# Altium PCB STM32_PCB.PcbDoc (part 2 of 2)
Units mil, origin at the board's own origin, x right, y up, seen from the top; angles counter-clockwise.
Board outline 3550 x 2490 mil, 4 copper layers (Top Layer, Power, Ground, Bottom Layer); 106 components, 122 nets, 470 pads, 207 vias.
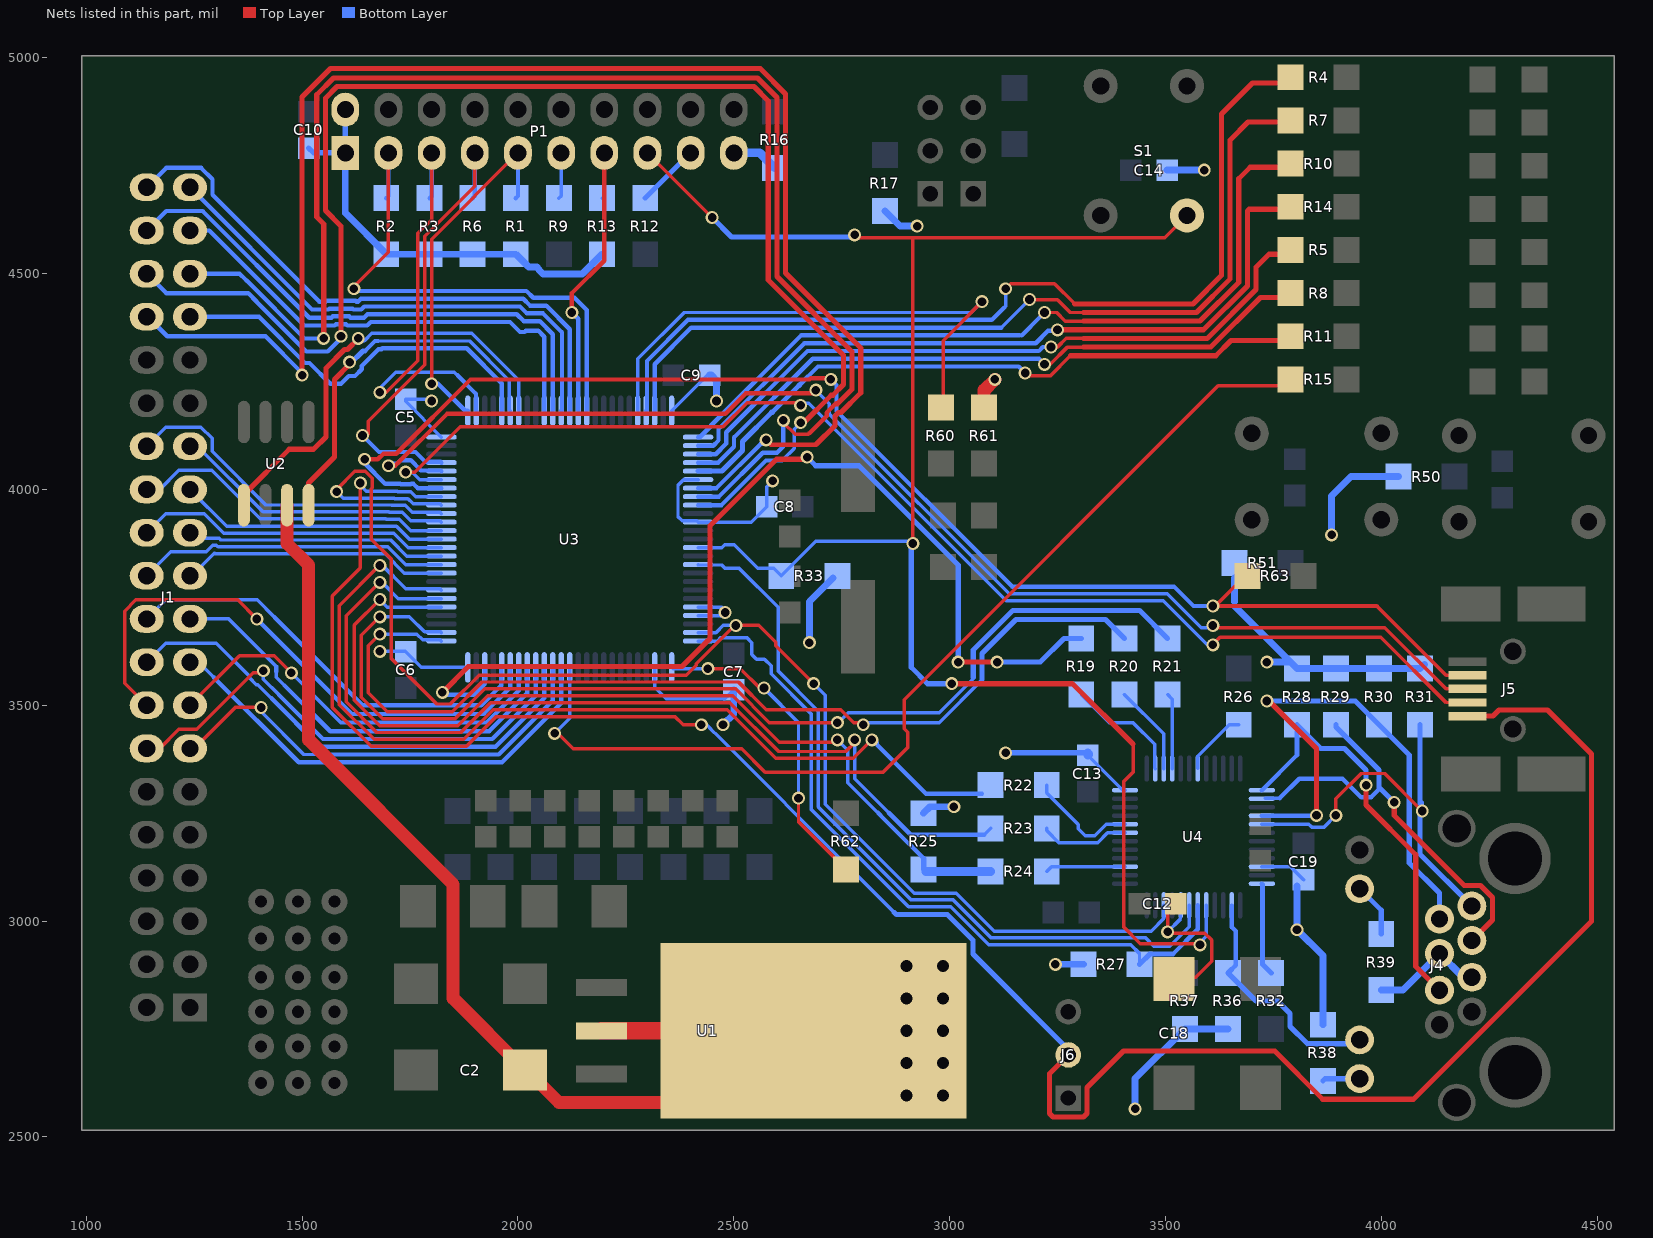
[diagram p4: the nets of this part, all layers, seen from the top]

## Via types
v1: diameter 30, hole 20, Top Layer to Bottom Layer, 162 vias
v2: diameter 50, hole 28, Top Layer to Bottom Layer, 45 vias

## Nets (pads, with @x,y where several pads share a name; then routed paths per layer and width w, separated by ;. In a path a pad name is that pad's centre, name@x,y a point inside that pad or via, vN(x,y) a via of type N, cw(c..) or ccw(c..) an arc to the next point about the centre after c; other vN are vias at no path point) (continued)
NetJ4_10: J4.10 R39.2 | length 125.7
  Bottom Layer w12: J4.10@3950,3075 4000,3025 R39.2@4000,2970
NetJ4_11: J4.11 R36.2 U4.26 | length 561.3
  Bottom Layer w10: R36.2@3654,2889 3663,2898 3663,2977 3654,2986 U4.26@3654,3036.12
  Bottom Layer w12: R36.2@3654,2889 R36.2@3645,2880 3710,2815 3759.8,2815 3789,2785.8 3789,2756.2 3829.2,2716 3941,2716 J4.11@3950,2725
NetJ4_12: J4.12 R38.1 | length 87.1
  Bottom Layer w12: R38.1@3865,2630 3870,2635 J4.12@3950,2635
NetJ5_1: J5.1 J6.2 U3.68 | length 5322.5
  Top Layer w8: v1(1635,4015) 1635,3818.18 1570,3753.18 1570,3495 1660,3405 1880.76,3405 1949.76,3474 2363.49,3474 2382.49,3455 v1(2425,3455)
  Top Layer w12: J6.2@3275,2690 3231.47,2646.47 3231.47,2554.67 3239.67,2546.47 3310.33,2546.47 3318.53,2554.67 3318.53,2614.54 3402.99,2699 3753.24,2699 3864.7,2587.54 4074.66,2587.54 4487.03,2999.91 4487.03,3387.3 4385.33,3489 4272.77,3489 4258.77,3475 J5.1@4200,3475
  Bottom Layer w8: v1(1635,4015) 1635,4010 1649,3996 1720.36,3996 1721.36,3995 1751.83,3995 1763.4,3983.43 U3.68@1822.76,3983.43 ; v1(2425,3455) 2436.97,3455 2448,3443.97 2448,3443.82 2463.82,3428 2463.97,3428 2775.99,3115.99 ; 2778.49,3113.49 2871.97,3020
  Bottom Layer w12: 2775.99,3115.99 2778.49,3113.49 ; 2871.97,3020 2876.97,3015 2994.8,3015 3054,2955.8 3054,2923.94 3275,2702.94 J6.2@3275,2690
NetJ5_2: J5.2 U3.70 | length 2928.1
  Top Layer w8: v1(1740,4040) 1761,4040 1866,4145 2475,4145 2531,4201 2654,4201 2655,4200 v1(2655,4195) ; v1(3610,3640) 3610,3641.48 3626.52,3658 3998.5,3658 4150,3506.5 J5.2@4200,3506.5
  Bottom Layer w8: v1@1739.04,4040 v1(1740,4040) 1754.91,4040 1772.12,4022.8 U3.70@1822.76,4022.8 ; v1(2655,4195) 2660,4200 2673.33,4200 3131.33,3742 3494.97,3742 3596.97,3640 v1(3610,3640)
NetJ5_3: J5.3 U3.71 | length 3029
  Top Layer w8: v1@3601.82,3680 4007.99,3680 4150,3537.99 J5.3@4200,3537.99
  Top Layer w10: v1(1700,4055) 1715.4,4055 1835.6,4175.2 2480.2,4175.2 2528,4223 2683,4223 v1(2690,4230)
  Bottom Layer w8: v1(2690,4230) 2721,4199 2721,4174.96 3137.96,3758 3504.63,3758 3582.63,3680 3605,3680 v1(3610,3685)
  Bottom Layer w10: v1@1694,4061 v1(1700,4055) ; v1@1700,4060 1720.4,4060 1728.4,4068 1751.6,4068 1773,4046.6 1773,4045.96 1774.79,4044.17 1821.07,4044.17 U3.71@1822.76,4042.48
NetJ5_4: J5.4 R63.2 U3.69 | length 3268.9
  Top Layer w8: v1@3615,3730 3685,3800 R63.2@3690,3800 ; 3989.49,3730 4150,3569.49 J5.4@4200,3569.49
  Top Layer w10: v1(1645,4070) 1675.4,4070 1688.4,4083 1717.95,4083 1889.95,4255 2675.4,4255 2678.4,4258 2722,4258 v1(2725,4255) ; v1(3610,3730) 3615,3730 3989.49,3730
  Bottom Layer w10: v1(1645,4070) 1645,4060.8 1692.8,4013 1727.4,4013 1728.4,4012 1751.6,4012 1752.6,4013 1757.87,4013 1767.76,4003.11 U3.69@1822.76,4003.11 ; v1(2725,4255) 2738,4242 2738,4182 3145,3775 3520,3775 3565,3730 v1(3610,3730)
NetP1_3: P1.3 R2.1 U3.90 | length 1248.4
  Top Layer w8: v1(1620,4465) 1620,4470 1700,4550 P1.3@1700,4780
  Bottom Layer w8: v1(1620,4465) v1@1625,4460
  Bottom Layer w10: v1@1625,4460 1645,4460 2019.59,4460 2035.59,4444 2131,4444 2159.37,4415.63 U3.90@2159.37,4182.24 ; R2.1@1695,4675 1700,4680 P1.3@1700,4780
NetP1_5: P1.5 R3.1 U3.77 | length 1029.7
  Top Layer w8: v1(1680,4225) 1695,4225 1768,4298 1768,4593.25 1800,4625.25 P1.5@1800,4780
  Bottom Layer w8: v1(1680,4225) 1680,4235 1717,4272 1852.54,4272 1860,4264.54
  Bottom Layer w10: R3.1@1795,4675 1800,4680 P1.5@1800,4780 ; 1860,4265 1860,4264.54 1903,4221.54 1903,4182.71 U3.77@1903.46,4182.24
NetP1_7: P1.7 R6.1 U3.72 | length 1084.4
  Top Layer w8: v1(1640,4125) 1650,4125 1653,4128 1653,4158 1784,4289 1784,4586.63 1900,4702.63 P1.7@1900,4780
  Bottom Layer w10: v1(1640,4125) 1678,4087 1762.76,4087 1785.81,4063.94 1820.98,4063.94 U3.72@1822.76,4062.17 ; R6.1@1895,4675 1900,4680 P1.7@1900,4780
NetP1_9: P1.9 R1.1 U3.76 | length 834.7
  Top Layer w8: v1(1800,4245) 1800,4580 P1.9@2000,4780
  Bottom Layer w10: v1(1800,4245) 1815,4245 1877.76,4182.24 U3.76@1883.78,4182.24 ; R1.1@1995,4675 2000,4680 P1.9@2000,4780
NetP1_11: P1.11 R9.1 | length 107.1
  Bottom Layer w8: R9.1@2095,4675 2100,4680 P1.11@2100,4780
NetP1_13: P1.13 R13.2 U3.89 | length 742
  Top Layer w10: v1(2125,4410) 2125,4455 2200,4530 P1.13@2200,4780
  Bottom Layer w8: R13.2@2195,4675 2200,4680 P1.13@2200,4780
  Bottom Layer w10: v1(2125,4410) 2139.69,4395.31 U3.89@2139.69,4182.24
NetP1_17: P1.17 R12.2 | length 148.5
  Bottom Layer w12: R12.2@2295,4675 P1.17@2400,4780
NetP1_19: P1.19 R16.2 | length 109.5
  Bottom Layer w20: P1.19@2500,4780 2560,4780 R16.2@2595,4745
NetR4_2: R4.2 U3.97 | length 2160.8
  Top Layer w8: v1(3130,4465) 3142,4477 3243,4477 3290,4430
  Top Layer w12: 3290,4430 3563.58,4430 3630,4496.42 3630,4870 3701.6,4941.6 3776.6,4941.6 R4.2@3790,4955
  Bottom Layer w8: 3126.63,4421.63 3130,4425 v1(3130,4465)
  Bottom Layer w10: U3.97@2297.17,4182.24 2298.85,4183.93 2298.85,4297.69 2394.16,4393 3098,4393 3126.63,4421.63
NetR5_2: R5.2 U3.3 | length 1612.4
  Top Layer w8: v1(3235,4330) 3250,4330 3270,4350 3310,4350
  Top Layer w12: 3310,4350 3596.72,4350 3710,4463.28 3710,4515 3740,4545 R5.2@3790,4545
  Bottom Layer w10: U3.3@2417.24,4081.85 2458.18,4081.85 2482.68,4106.35 2482.68,4132.68 2671,4321 3206.91,4321 3215.91,4330 3230,4330 v1@3235,4325
NetR7_2: R7.2 U3.98 | length 2028.5
  Top Layer w8: v1(3185,4440) 3250,4440 3280,4410 3310,4410
  Top Layer w12: 3310,4410 3571.86,4410 3650,4488.14 3650,4810 3691.6,4851.6 3786.6,4851.6 R7.2@3790,4855
  Bottom Layer w8: 3120,4375 v1(3185,4440)
  Bottom Layer w10: U3.98@2316.85,4182.24 2316.85,4290.23 2401.62,4375 3120,4375
NetR8_2: R8.2 U3.4 | length 1569
  Top Layer w8: v1(3220,4290) 3233.18,4290 3273.18,4330 3310,4330
  Top Layer w12: 3310,4330 3605,4330 3720,4445 3780,4445 R8.2@3790,4455
  Bottom Layer w8: v1@3215,4285 v1(3220,4290)
  Bottom Layer w10: U3.4@2417.24,4062.17 2463.95,4062.17 2500.68,4098.89 2500.68,4120.68 2683,4303 3207,4303 3215,4295 v1@3215,4285
NetR10_2: R10.2 U3.1 | length 1793.1
  Top Layer w8: v1(3220,4410) 3248.18,4410 3268.18,4390 3310,4390
  Top Layer w12: 3310,4390 3580.15,4390 3670,4479.85 3670,4720 3696.6,4746.6 3781.6,4746.6 R10.2@3790,4755
  Bottom Layer w8: 3162,4357 3167,4357 ; v1@3210.63,4400.63 v1(3220,4410)
  Bottom Layer w10: U3.1@2417.24,4121.22 2421.22,4121.22 2446.68,4146.68 2446.68,4147.59 2656.09,4357 3162,4357 ; 3167,4357 v1@3210.63,4400.63
NetR11_2: R11.2 U3.5 | length 1528.6
  Top Layer w8: v1(3175,4270) 3182,4263 3233,4263 3280,4310
  Top Layer w12: 3280,4310 3616.72,4310 3651.72,4345 R11.2@3790,4345
  Bottom Layer w10: 2651.6,4241.6 2695,4285 3160,4285 v1(3175,4270)
  Bottom Layer w12: U3.5@2417.24,4042.48 2472.47,4042.48 2520,4090.01 2520,4111.01 2587.99,4179 2589,4179 2651.6,4241.6
NetR14_2: R14.2 U3.2 | length 1719
  Top Layer w12: v1(3250,4370) 3588.43,4370 3690,4471.57 3690,4645 3694.1,4649.1 3784.1,4649.1 R14.2@3790,4655
  Bottom Layer w8: v1@3247.63,4367.63 v1(3250,4370)
  Bottom Layer w10: U3.2@2417.24,4101.54 2452.41,4101.54 2464.68,4113.8 2464.68,4140.13 2663.54,4339 3199.46,4339 3228.09,4367.63 v1@3247.63,4367.63
NetR15_2: R15.2 U3.38 | length 2358.7
  Top Layer w8: v1(2085,3435) 2091.82,3435 2127.82,3399 2518.37,3399 2572.37,3345 2845.81,3345 2903,3402.19 2903,3437.81 2895,3445.81 2895,3513.18 3621.82,4240 3785,4240 R15.2@3790,4245
  Bottom Layer w8: v1(2085,3435) 2120,3470 U3.38@2120,3587.76
NetR19_1: R19.1 U3.48 | length 2366.1
  Top Layer w12: v1(1825,3530) 1885,3590 2380,3590 2445,3655 2445,3916.01 2598.99,4070 2665,4070 v1(2670,4075) ; v1@3015,3605 v1(3020,3600) v1(3110,3600)
  Bottom Layer w10: v1(1825,3530) 1830.68,3524.32 1897.82,3524.32 1923.15,3549.65 U3.48@1923.15,3587.76
  Bottom Layer w12: v1(2670,4075) 2690,4055 2790,4055 3020,3825 v1(3020,3600) ; v1(3110,3600) 3210,3600 3265,3655 R19.1@3305,3655
NetR19_2: R19.2 U4.2 | length 274.8
  Bottom Layer w8: R19.2@3305,3525 3370,3460 3425,3460 3475,3410 3475,3354.88 U4.2@3476.42,3353.46
NetR20_1: R20.1 U3.51 | length 2291.5
  Top Layer w8: v1(1680,3665) 1653,3638 1653,3528.82 1696.82,3485 1847.63,3485 1916.63,3554 2511,3554 2575,3490 2748.18,3490 2778.18,3460 2795,3460 v1(2800,3455)
  Bottom Layer w8: v1(1680,3665) 1765.97,3665 1779.41,3651.56 1819.98,3651.56 U3.51@1822.76,3648.78 ; v1(2800,3455) 2805,3460 2975.81,3460 3075,3559.19 3075,3560
  Bottom Layer w12: 3075,3560 3075,3620 3154,3699 3361,3699 R20.1@3405,3655
NetR20_2: R20.2 U4.3 | length 209.3
  Bottom Layer w8: R20.2@3405,3525 3496.1,3433.9 U4.3@3496.1,3353.46
NetR21_1: R21.1 U3.52 | length 2485.1
  Top Layer w8: v1(1680,3705) 1637,3662 1637,3518.51 1686.51,3469 1854.25,3469 1923.25,3538 2504.37,3538 2582.37,3460 v1(2740,3460)
  Bottom Layer w8: v1(1680,3705) 1748.6,3705 1783.6,3670 1821.22,3670 U3.52@1822.76,3668.46 ; v1(2740,3460) 2741.82,3460 2764.82,3483 2976.18,3483 3055,3561.82 3055,3565 ; 3246.82,3720 3250,3720
  Bottom Layer w12: 3055,3565 3055,3628.28 3146.72,3720 3246.82,3720 ; 3250,3720 3440,3720 R21.1@3505,3655
NetR21_2: R21.2 U4.4 | length 176
  Bottom Layer w8: R21.2@3505,3525 3515.79,3514.21 U4.4@3515.79,3353.46
NetR22_1: R22.1 U3.57 | length 2201.2
  Top Layer w8: v1(1680,3824) 1680,3825 1586,3731 1586,3501.63 1666.63,3421 1874.14,3421 1943.14,3490 2484.49,3490 2597.49,3377 2777,3377 v1(2820,3420)
  Bottom Layer w8: v1(1680,3824) 1680,3825 1685,3825 1740.33,3769.67 1819.98,3769.67 U3.57@1822.76,3766.89
  Bottom Layer w10: v1(2820,3420) 2825,3420 2832,3413 2832,3408.4 2945.4,3295 R22.1@3075,3295
NetR22_2: R22.2 U4.44 | length 257.5
  Bottom Layer w8: R22.2@3225,3315 3225,3296.82 3298,3223.82 3298,3213.82 3313.82,3198 3336.18,3198 3362.71,3224.53 U4.44@3406.54,3224.53
NetR23_1: R23.1 U3.56 | length 2230.4
  Top Layer w8: v1(1680,3785) 1602,3707 1602,3508.25 1673.25,3437 1867.51,3437 1936.51,3506 2491.12,3506 2604.12,3393 2759.45,3393 2780,3413.55 v1(2780,3420)
  Bottom Layer w8: v1(1680,3785) 1685,3785 1722.8,3747.2 U3.56@1822.76,3747.2 ; v1(2780,3420) 2780,3330 2859,3251 ; R23.1@3080,3200 R23.1@3095,3215
  Bottom Layer w10: 2859,3251 2910,3200 R23.1@3080,3200
NetR23_2: R23.2 U4.43 | length 207.7
  Bottom Layer w8: R23.2@3225,3215 3225,3210 3253,3182 3342.81,3182 3365.81,3205 3406.38,3205 U4.43@3406.54,3204.84
NetR24_1: R24.1 R25.1 U3.55 | length 2168
  Top Layer w8: v1(1680,3745) 1621,3686 1621,3511.88 1679.88,3453 1860.88,3453 1929.88,3522 2497.75,3522 2605,3414.75 2737.71,3414.75 2740,3417.04 v1(2740,3420)
  Bottom Layer w8: v1(1680,3745) 1697.48,3727.52 U3.55@1822.76,3727.52 ; v1(2740,3420) 2764,3396 2764,3321 2834,3251 ; R25.1@2940,3120 R25.1@2945,3115
  Bottom Layer w10: 2834,3251 2841,3244 2841,3243.54 2902.54,3182 2903,3182 R25.1@2940,3145
  Bottom Layer w12: R25.1@2940,3120 R25.1@2940,3145
  Bottom Layer w20: R25.1@2945,3115 R24.1@3095,3115
NetR24_2: R24.2 U4.39 | length 186.1
  Bottom Layer w8: R24.2@3225,3115 3236.1,3126.1 U4.39@3406.54,3126.1
NetR26_1: R26.1 U4.7 | length 153.6
  Bottom Layer w8: U4.7@3575,3353.62 3575,3382.04 3647.96,3455 R26.1@3670,3455
NetR27_1: R27.1 U3.25 U4.30 | length 1735
  Bottom Layer w8: U3.25@2417.24,3648.78 2461.81,3648.78 2470.03,3657 2529.97,3657 2542,3644.97 2542,3617.75 2552.75,3607 2571.18,3607 2587,3591.18 2587,3572.75 2680,3479.75 2680,3257.77 2904.77,3033 3002.25,3033 3090.25,2945 3420,2945 3440,2925 R27.1@3440,2900
  Bottom Layer w10: 3517.64,2924 3574.84,2981.2 3574.84,2984.84 U4.30@3574.84,3036.54
  Bottom Layer w12: R27.1@3440,2900 3464,2924 3517.64,2924
NetR32_2: R32.2 U4.24 | length 215.7
  Bottom Layer w10: U4.24@3723.46,3086.73 U4.24@3725,3085.2
  Bottom Layer w12: U4.24@3725,3085.2 3725,2900 R32.2@3745,2880
NetR60_2: R60.2 U3.96 | length 1244.9
  Top Layer w8: R60.2@2985,4200 2985,4345 v1(3075,4435)
  Bottom Layer w8: U3.96@2277.48,4182.24 2277.48,4302.48 2385,4410 3050,4410 v1(3075,4435)
NetR62_2: R62.2 U3.26 | length 727.3
  Top Layer w8: v1(2440,3585) 2515,3585 2560,3540 v1(2570,3540) ; v1(2650,3285) 2650,3230 R62.2@2760,3120
  Bottom Layer w8: U3.26@2360,3585 v1(2440,3585) ; v1(2570,3540) 2650,3460 v1(2650,3285)
NetU2_1: U2.1 U3.82 | length 1030.4
  Top Layer w12: U2.1@1365,3963.54 1365,3988.26 1469.98,4093.24 1526.51,4093.24 1555,4121.74 1555,4281.01 1597.99,4324 1605.01,4324 1630,4348.99 v1(1630,4350)
  Bottom Layer w8: v1(1630,4350) 1635,4345 1644.54,4345 1661.54,4362 1893,4362 2001.89,4253.11 U3.82@2001.89,4182.24
NetU2_4: U2.4 U3.81 | length 877.2
  Top Layer w12: U2.4@1515,3963.54 1515,4015 1575,4075 1575,4255 1610,4290 v1(1610,4295)
  Bottom Layer w8: 1676,4344 1888.37,4344 1980,4252.37 1980,4184.45 U3.81@1982.2,4182.24
  Bottom Layer w10: 1646,4321 1669,4344 1676,4344
  Bottom Layer w12: v1(1610,4295) 1610,4290 1641,4321 1646,4321
NetU3_16: U3.16 U4.31 | length 1788.8
  Bottom Layer w8: U3.16@2417.24,3825.94 2418.19,3825 2471.82,3825 2478.82,3818 2512,3818 2603,3727 2603,3579.37 2696,3486.37 2696,3264.4 2911.4,3049 3008.88,3049 3096.88,2961 3454,2961 3473,2942 3510.18,2942 3555.16,2986.97 U4.31@3555.16,3036.54
NetU3_24: U3.24 U3.67 U4.34 | length 3297.7
  Top Layer w8: v1(1580,3995) 1580,4000 1622,4042 1646.18,4042 1662,4026.18 1662,4003.82 1660,4001.82 1660,3885 1707,3838 1707,3608 1812,3503 1843,3503 1910,3570 2390,3570 2413,3593 2413,3596.18 2501.82,3685 v1(2505,3685) 2558.18,3685 2597,3646.18 2597,3638 v1(2685,3550)
  Bottom Layer w8: v1(1580,3995) 1595,3980 1713.73,3980 1714.73,3979 1745.2,3979 1757.68,3966.52 1819.98,3966.52 U3.67@1822.76,3963.74 ; U3.24@2417.24,3668.46 2458.87,3668.46 2475.4,3685 v1(2505,3685) ; v1(2685,3550) 2712,3523 2712,3271.03 2918.03,3065 3015.51,3065 3103.51,2977 3467,2977 3496.1,3006.1 U4.34@3496.1,3036.54
PC12: J1.33 U3.80 | length 922.4
  Bottom Layer w10: J1.33@1240,4400 1400,4400 1507,4293 1517,4293 1565,4245 1590,4245 1608,4263 1622.6,4263 1638,4278.4 1638,4286.13 1676.87,4325 1683.87,4325 1685.87,4327 1881.33,4327 1962.52,4245.81 U3.80@1962.52,4182.24
PC13: J1.34 U3.7 | length 3489.7
  Top Layer w10: v1(2575,4115) 2586,4104 2690.57,4104
  Top Layer w12: v1(1500,4265) 1500,4909.03 1565.97,4975 2561.57,4975 2620,4916.57 2620,4501.57 2794,4327.57 2794,4224 2748.47,4178.47 2742.43,4178.47 2734.23,4170.27 2734.23,4147.66 2690.57,4104
  Bottom Layer w10: J1.34@1140,4400 1142.54,4400 1187.63,4354.91 1415.09,4354.91 1500,4270 v1(1500,4265) ; U3.7@2417.24,4003.11 2459.97,4003.11 2562.86,4106 2566,4106 v1(2575,4115)
PC14: J1.35 U3.8 | length 3320.9
  Top Layer w8: v1(2615,4160) 2615,4155 2642,4128 2673,4128 2675,4130
  Top Layer w10: 2675,4130 2715.23,4170.23 2715.23,4178.14 2735.56,4198.47 2738.47,4198.47
  Top Layer w12: v1(1550,4350) 1550,4615 1533.91,4631.09 1533.91,4914.66 1572.63,4953.37 2554.91,4953.37 2600,4908.28 2600,4493.28 2774,4319.28 2774,4232.28 2740.18,4198.47 2738.47,4198.47
  Bottom Layer w10: J1.35@1240,4500 1355,4500 1370,4485 ; 1370.46,4485 1505.46,4350 v1(1550,4350) ; U3.8@2417.24,3983.43 2465.74,3983.43 2567.32,4085 2600,4085 2615,4100 v1(2615,4160)
PC15: J1.36 U3.9 | length 3366.9
  Top Layer w12: v1@1590,4350 v1(1590,4355) 1590,4610 1553.91,4646.09 1553.91,4906.37 1580.91,4933.37 2546.63,4933.37 2580,4900 2580,4485 2754,4311 2754,4242.99 2729.48,4218.47 2725.87,4218.47 2662.4,4155 v1(2655,4155)
  Bottom Layer w8: 2612,4067 2615,4070 2640,4095 2640,4140 v1(2655,4155)
  Bottom Layer w10: J1.36@1140,4500 1185.09,4454.91 1375.09,4454.91 1395,4435 ; 1395,4434.54 1509.77,4319.77 1559.37,4319.77 v1@1589.6,4350 ; U3.9@2417.24,3963.74 2471.51,3963.74 2574.77,4067 2612,4067
PD4: J1.37 U3.85 | length 1106.2
  Bottom Layer w10: J1.37@1240,4600 1285,4600 1505,4380 1575.4,4380 1578.4,4383 1601.6,4383 1604.6,4380 1650.97,4380 1658.97,4388 1981.6,4388 2004.6,4365 2015.4,4365 2018.4,4368 2047,4368 2060.94,4354.06 U3.85@2060.94,4182.24
PD5: J1.38 U3.86 | length 1264.2
  Bottom Layer w10: J1.38@1140,4600 1185.09,4645.09 1269.46,4645.09 1516.54,4398 1567.95,4398 1570.95,4401 1609.05,4401 1612.05,4398 1643.51,4398 1651.51,4406 1997.22,4406 2013.22,4390 2050.46,4390 2080.63,4359.83 U3.86@2080.63,4182.24
PD6: J1.39 U3.87 | length 1191
  Bottom Layer w10: J1.39@1240,4700 1523,4417 1561.49,4417 1563.49,4419 1616.51,4419 1618.51,4417 1637.05,4417 1644.05,4424 2004.68,4424 2020.68,4408 2057.91,4408 2102,4363.91 2102,4183.93 U3.87@2100.32,4182.24
PD7: J1.40 U3.88 | length 1371.2
  Bottom Layer w10: J1.40@1140,4700 1185.09,4745.09 1265.96,4745.09 1292.37,4718.68 1292.37,4682.63 1540,4435 1554.03,4435 1556.03,4437 1623.97,4437 1625.97,4435 1629.6,4435 1636.6,4442 2012.14,4442 2028.14,4426 2065.37,4426 2120,4371.37 U3.88@2120,4182.24
PE8: J1.17 U3.39 | length 1095.7
  Bottom Layer w8: J1.17@1240,3600 1260,3600 1295,3565
  Bottom Layer w10: 1295,3565 1492,3368 1963,3368 2100.32,3505.32 U3.39@2100.32,3587.76
PE10: J1.18 U3.41 | length 1158.2
  Bottom Layer w8: J1.18@1140,3600 1184.09,3644.09 1300.91,3644.09 1378,3567 1378,3563.82 1393.82,3548 1397,3548 1428.86,3516.14
  Bottom Layer w10: 1428.86,3516.14 1541,3404 1948.09,3404 2060.94,3516.86 U3.41@2060.94,3587.76
PE12: J1.19 U3.43 | length 999.9
  Bottom Layer w8: J1.19@1240,3700 1330,3700 1440,3590 ; 1440,3577.63 1440,3565 1459.32,3545.68
  Bottom Layer w10: 1440,3577.63 1440,3590 ; 1459.32,3545.68 1565,3440 1933.18,3440 2021.57,3528.4 U3.43@2021.57,3587.76
PE15: J1.20 U3.46 | length 1001.8
  Bottom Layer w8: J1.20@1140,3700 1184.09,3744.09 1390.91,3744.09 1395.91,3744.09 1435.91,3704.09
  Bottom Layer w10: 1435.91,3704.09 1640,3500 1915,3500 1961,3546 1961,3586.24 U3.46@1961.74,3586.98
  Bottom Layer w12: U3.46@1961.74,3586.98 U3.46@1962.52,3587.76
RDN: J4.6 R28.1 U4.13 | length 969.4
  Top Layer w12: v1(3965,3315) 3965,3268.99 4080,3153.99 4080,2895 J4.6@4135,2840
  Bottom Layer w10: U4.13@3723.46,3303.27 3805,3384.8
  Bottom Layer w12: 3805,3384.8 R28.1@3805,3455 3860,3400 3915,3400 3965,3350 v1(3965,3315)
RDP: J4.3 R29.1 U4.14 | length 1009.9
  Top Layer w12: v1(4030,3275) 4030,3245 4192.54,3082.46 4229.66,3082.46 4257.46,3054.66 4257.46,3002.46 J4.3@4210,2955
  Bottom Layer w8: U4.14@3731,3285 3765,3285
  Bottom Layer w10: 3765,3285 3810,3330 3910.4,3330 3953.4,3287 3976.6,3287 3997.3,3307.7
  Bottom Layer w12: R29.1@3895,3455 3895,3450 3995,3350 3995,3310 3997.3,3307.7 v1(4030,3275) v1@4025,3280
RST: P1.15 R33.2 S1.2 U3.14 U4.29 | length 4235.5
  Top Layer w8: P1.15@2300,4780 v1(2450,4630) ; v1(2780,4590) 2776,4586 2776,4584 2777,4583 2915,4583 ; v1(2915,3875) 2915,4583 ; 3425,3410 3425,3345 3403,3323 3403,2987 3442,2948 3577,2948 v1(3580,2945) ; S1.2@3550,4635 3498,4583 2915,4583
  Top Layer w12: v1(3005,3550) 3285,3550 3425,3410
  Bottom Layer w8: U3.14@2417.24,3865.32 2472.13,3865.32 2478.82,3872 2501.18,3872 2555.68,3817.5 2592.5,3817.5 R33.2@2610,3800 2690,3880 2910,3880 v1(2915,3875) ; v1@3580,2950 3594.53,2964.53 U4.29@3594.53,3036.54
  Bottom Layer w12: v1(2450,4630) 2495,4585 2775,4585 v1(2780,4590) ; v1(2915,3875) 2911,3871 2911,3587.99 2948.99,3550 v1(3005,3550)
T1_CH1: J1.13 U3.40 | length 1059.5
  Top Layer w8: J1.13@1240,3400 1250,3400 1345,3495 v1(1405,3495)
  Bottom Layer w8: v1(1405,3495) 1405,3485 1504,3386 1569,3386
  Bottom Layer w10: 1569,3386 1955.54,3386 2080.63,3511.09 U3.40@2080.63,3587.76
T1_CH2: J1.14 U3.42 | length 1159.5
  Top Layer w8: J1.14@1140,3400 1170.37,3400 1214.46,3444.09 1255.9,3444.09 1386.82,3575 1405,3575 v1(1410,3580)
  Bottom Layer w8: v1(1410,3580) 1410,3560.46 1446.59,3523.87
  Bottom Layer w10: 1446.59,3523.87 1548.46,3422 1940.63,3422 2041.26,3522.63 U3.42@2041.26,3587.76
T1_CH3: J1.15 U3.44 | length 958
  Top Layer w8: J1.15@1240,3500 1355,3615 1435,3615 v1(1475,3575)
  Bottom Layer w8: v1(1475,3575) 1590,3460
  Bottom Layer w10: 1590,3460 1927.72,3460 2001.89,3534.17 U3.44@2001.89,3587.76
T1_CH4: J1.16 U3.45 | length 1324.8
  Top Layer w8: J1.16@1140,3500 1088.63,3551.37 1088.63,3718.26 1114.46,3744.09 1350.91,3744.09 v1(1395,3700)
  Bottom Layer w8: v1(1395,3700) v1@1405,3690
  Bottom Layer w10: v1@1405,3690 1615,3480 1920.46,3480 1982,3541.54 1982,3587.55 U3.45@1982.2,3587.76
T3_CH1: J1.25 U3.63 | length 630.4
  Bottom Layer w8: J1.25@1240,4000 1325,3915 1718.69,3915 1748.69,3885 U3.63@1822.76,3885
T3_CH2: J1.26 U3.64 | length 758.8
  Bottom Layer w8: J1.26@1140,4000 1170.37,4000 1214.46,4044.09 1290.66,4044.09 1402.75,3932 1693.85,3932 1694.85,3931 1725.32,3931 1751.63,3904.69 U3.64@1822.76,3904.69
T3_CH3: J1.27 U3.65 | length 655.5
  Bottom Layer w8: J1.27@1240,4100 1257.37,4100 1409.37,3948 1700.48,3948 1701.48,3947 1731.95,3947 1751.8,3927.15 1819.98,3927.15 U3.65@1822.76,3924.37
T3_CH4: J1.28 U3.66 | length 801.2
  Bottom Layer w8: J1.28@1140,4100 1184.09,4144.09 1265.54,4144.09 1291.37,4118.26 1291.37,4088.63 1416,3964 1707.11,3964 1708.11,3963 1738.58,3963 1754.74,3946.83 1819.98,3946.83 U3.66@1822.76,3944.06
T4_CH1: J1.21 U3.59 | length 623.2
  Bottom Layer w8: J1.21@1240,3800 1244.63,3800 1296.63,3852 1297.49,3852 1298.49,3851 1692.18,3851 1736.92,3806.26 U3.59@1822.76,3806.26
T4_CH2: J1.22 U3.60 | length 730.8
  Bottom Layer w8: J1.22@1140,3800 1195.91,3855.91 1277.92,3855.91 1293,3871 1301.12,3871 1305.12,3867 1698.81,3867 1739.87,3825.94 U3.60@1822.76,3825.94
T4_CH3: J1.23 U3.61 | length 605.3
  Bottom Layer w8: J1.23@1240,3900 1253,3887 1307.75,3887 1311.75,3883 1705.44,3883 1742.81,3845.63 U3.61@1822.76,3845.63
T4_CH4: J1.24 U3.62 | length 733.6
  Bottom Layer w8: J1.24@1140,3900 1184.09,3944.09 1273.29,3944.09 1318.37,3899 1712.07,3899 1745.75,3865.32 U3.62@1822.76,3865.32
TDN: J4.2 R30.2 U4.16 | length 1232.9
  Top Layer w12: v1(3735,3510) 3740,3510 3850,3400 v1(3850,3245)
  Bottom Layer w10: U4.16@3723.46,3244.21 v1@3850,3244.21
  Bottom Layer w12: v1(3735,3510) 3940,3510 R30.2@3995,3455 4065,3385 4065,3135 4135,3065 J4.2@4135,3005
TDP: J4.1 R31.1 U4.17 | length 1060.8
  Top Layer w8: v1(3895,3245) 3895,3283.18 3953.82,3342 4008,3342 v1(4095,3255)
  Bottom Layer w8: U4.17@3723.46,3224.53 3832.29,3224.53 3838.82,3218 3868,3218 v1(3895,3245) ; 4090,3360 4090,3280 4095,3275 v1(4095,3255)
  Bottom Layer w12: R31.1@4090,3455 4090,3360 4090,3155 J4.1@4210,3035
VCC: C2.1 C5.2 C6.2 C7.2 C8.2 C9.2 C10.2 C12.2 C13.2 C14.2 C18.1 C19.2 J4.4 J4.5 P1.1 P1.2 R1.2 R2.2 R3.2 R6.2 R13.1 R17.1 R25.2 R27.2 R28.2 R29.2 R30.1 R31.2 R33.1 R36.1 R37.1 R38.2 R39.1 R50.1 R51.1 R61.2 U1.2 U1.4 U2.3 U3.6 U3.11 U3.21 U3.22 U3.28 U3.50 U3.75 U3.100 U4.22 U4.32 U4.48 | length 8545.3
  Top Layer w8: C18.1@3520,2865.98 3524.02,2870 3570,2870 3607,2907 3607,2956.18 3591.18,2972 3508,2972 v1(3505,2975) 3505,3021 C12.2@3524,3040
  Top Layer w16: U1.4@2519,2580 U1.4@2685,2746
  Top Layer w30: U2.3@1465,3963.54 1465,3875 1515,3825 1515,3420 1850,3085 1850,2820.98 C2.1@2015.98,2655 2020,2655 2095,2580 U1.4@2519,2580 ; R61.2@3080,4190 3080,4230 v1(3105,4255)
  Top Layer w40: U1.2@2193.78,2746 U1.4@2685,2746
  Bottom Layer w8: v1(1680,3625) 1739,3625 C6.2@1740,3624 1776.24,3587.76 U3.50@1883.78,3587.76 ; v1(1800,4205) 1796,4209 C5.2@1740,4209 1740,4203.98 U3.75@1822.76,4121.22 ; U3.28@2316.85,3587.76 2316.85,3541.85 2343.7,3515 2479,3515 C7.2@2500,3536 ; U3.100@2356.22,4182.24 2438.98,4265 C9.2@2444,4265 ; U3.22@2417.24,3707.83 2477.83,3707.83 v1@2485,3715 ; U3.21@2417.24,3727.52 2472.48,3727.52 v1@2485,3715 ; U3.6@2417.24,4022.8 2383.49,4022.8 2370.81,4010.11 2370.81,3937.05 2380.71,3927.15 2414.46,3927.15 U3.11@2417.24,3924.37 2540.37,3924.37 C8.2@2576,3960 2576,4006 v1(2590,4020) ; v1(2480,3715) v1@2485,3715 ; C13.2@3320,3384 3400.73,3303.27 U4.48@3406.54,3303.27 ; v1(3505,2975) 3535,3005 3535,3036.06 U4.32@3535.47,3036.54 ; U4.22@3723.46,3126.1 3789.9,3126.1 C19.2@3820,3096
  Bottom Layer w12: C10.2@1515,4791 1526,4780 P1.1@1600,4780 P1.2@1600,4880 ; v1(3130,3390) C13.2@3320,3390
  Bottom Layer w16: P1.1@1600,4780 1600,4640 R2.2@1695,4545 R3.2@1795,4545 R6.2@1895,4545 R1.2@1995,4545 2025,4515 2043.74,4515 2049,4509.74 2049,4508.37 2058.37,4499 2149,4499 R13.1@2195,4545 ; C9.2@2444,4265 2448,4265 2460,4253 v1(2460,4205) ; v1(2475,3455) 2500,3480 C7.2@2500,3536 ; v1(2675,3645) 2675,3740 R33.1@2730,3795 ; R17.1@2850,4645 2885,4610 v1(2925,4610) ; R25.2@2940,3250 2955,3265 v1(3010,3265) ; v1(3245,2900) R27.2@3310,2900 ; v1(3430,2565) 3430,2635 R37.1@3545,2750 R36.1@3645,2750 ; C14.2@3504,4740 v1(3590,4740) ; 3660,3730 R28.2@3805,3585 ; 3660,3740 3660,3795 ; v1(3735,3600) 3790,3600 R28.2@3805,3585 ; C19.2@3805,3081 v1(3805,2980) 3865,2920 R38.2@3865,2760 ; v1(3885,3895) 3885,3985 3930,4030 R50.1@4040,4030 ; R39.1@4000,2840 4050,2840 J4.4@4135,2925 4190,2870 J4.5@4210,2870 ; R31.2@4100,3595 R31.2@4090,3585 R30.1@3995,3585 R29.2@3895,3585 R28.2@3805,3585
  Bottom Layer w20: C13.2@3320,3384 3322,3386 3322,3388 C13.2@3320,3390
  other v2: 2900,2596 2985,2596 2900,2671 2985,2671 2900,2746 2985,2746 2900,2821 2985,2821 2900,2896 2985,2896
pads on no net: J4.7 J4.FIX1 J4.FIX2 J4.FIX3 J4.FIX4 J5.10 J5.11 S1.3 S1.4 S2.3 S2.4 S3.3 S3.4 U2.5 U3.23 U3.33 U3.34 U3.47 U3.53 U3.54 U3.58 U3.73 U3.93 U3.95 U4.1 U4.5 U4.6 U4.8 U4.9 U4.10 U4.11 U4.12 U4.20 U4.21 U4.25 U4.27 U4.33 U4.38 U4.40 U4.41 U4.42 U4.45 U4.46

## Polygon pours and split planes (outlines as drawn)
GND on Top Layer "Top Layer-No Net" (solid, remove dead copper, pour order 1000): 1000,5000 1005,5005 4540,5005 4540,2515 4535,2520 995,2520
VCC on Power "Top Layer-No Net" (solid, remove dead copper, pour order 1000): 1000,5000 1005,5005 4540,5005 4540,2515 4535,2520 995,2520
GND on Ground "Top Layer-No Net" (solid, remove dead copper, pour order 1000): 985,5000 990,5005 4525,5005 4525,2515 4520,2520 980,2520
GND on Bottom Layer "Top Layer-No Net" (solid, remove dead copper, pour order 1001): 1000,5000 1005,5005 4540,5005 4540,2515 4535,2520 995,2520

## Other copper
Top Layer:
  rectangle net GND: 1355,2540 1625,3125
  rectangle net GND: 1875,3640 2365,4130
  region net GND: 3535,3305 3670,3305 3670,3090 3460,3090 3460,3230
Bottom Layer:
  rectangle net VCC: 2835,2540 3040,2950

## Silkscreen, mask and mechanical layers (free items; w line width, h text height)
Top Overlay:
  drawing of 1944 lines, arcs and shapes, not listed
  text "PE0" at 4420,4931 h60
  text "Flash" at 3125,4870 h50
  text "Sys" at 2810,4865 h50
  text "PE1" at 4420,4830.5 h60
  text "PE2" at 4420,4730.5 h60
  text "Sys/RAM" at 3120,4675 h35
  text "RAM" at 2790,4670 h50
  text "PE3" at 4420,4631 h60
  text "PE4" at 4420,4531 h60
  text "BOOT" at 2770,4510 h60
  text "PE5" at 4420,4431 h60
  text "PE6" at 4415,4331.5 h60
  text "PE7" at 4415,4231 h60
  text "PORT E" at 4110,4210 h60 r90
  text "GND" at 2424,3655 h60 r90
  text "!!!" at 3005,3645 h60 r90
  text "3.3V" at 3100,3645 h60 r90
  text "Carte CPU STM32F107" at 3210,3370 h70 r90
  text "Gwenn & Jacen" at 3290,3370 h70 r90
  text "Club Robot ESEO 2010" at 3375,3370 h70 r90
  text "GND" at 1684,2555 h60 r90
  text "USB VBUS" at 3210,2553 h50 r90
  text "Periph / Host" at 3370,2553 h50 r90
Bottom Overlay:
  drawing of 1715 lines, arcs and shapes, not listed
Top Solder:
  rectangle: 1875,3640 2365,4130
  rectangle: 1355,2540 1625,3125
  region: 3535,3305 3670,3305 3670,3090 3460,3090 3460,3230
Bottom Solder:
  rectangle: 2835,2540 3040,2950
Drill Drawing:
  lines w10: 3855,5005 990,5005 990,2515 4540,2515 4540,5005 3860,5005

## Text inside footprints (layer, text, board x,y; h text height)
U1: Top Overlay "VCC" at 3100,2826 h60 r90; Bottom Overlay "VCC" at 3100,2826 h60 r90